# Altium PCB PCB2.PcbDoc
Units mm, origin at the board's own origin, x right, y up, seen from the top; angles counter-clockwise.
Board outline 50 x 20 mm, 2 copper layers (Top Layer, Bottom Layer); 47 components, 32 nets, 170 pads, 25 vias.
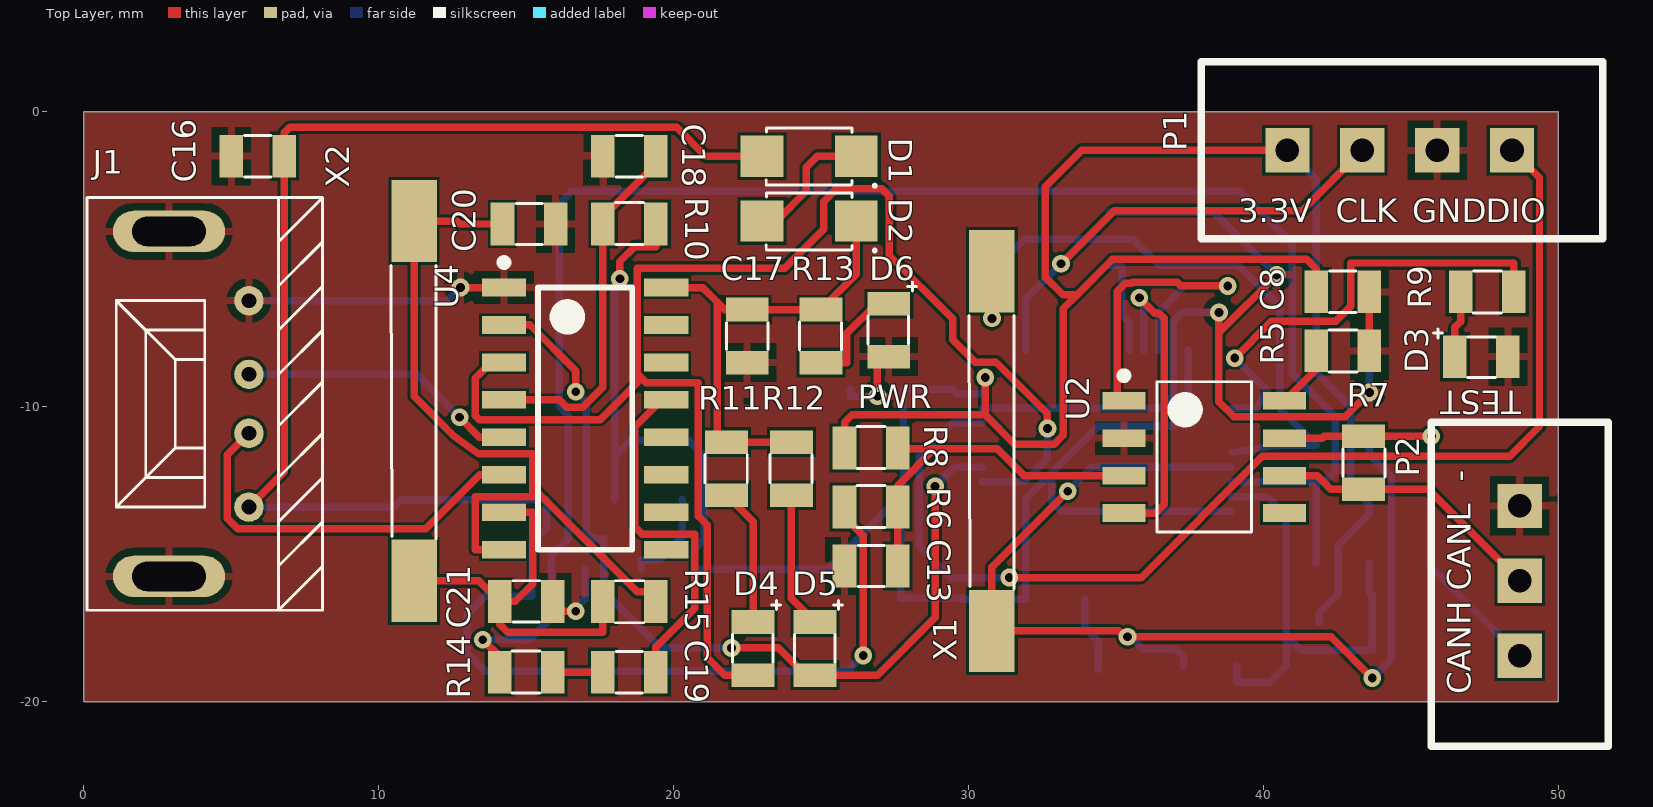
[diagram p0: Top Layer view]
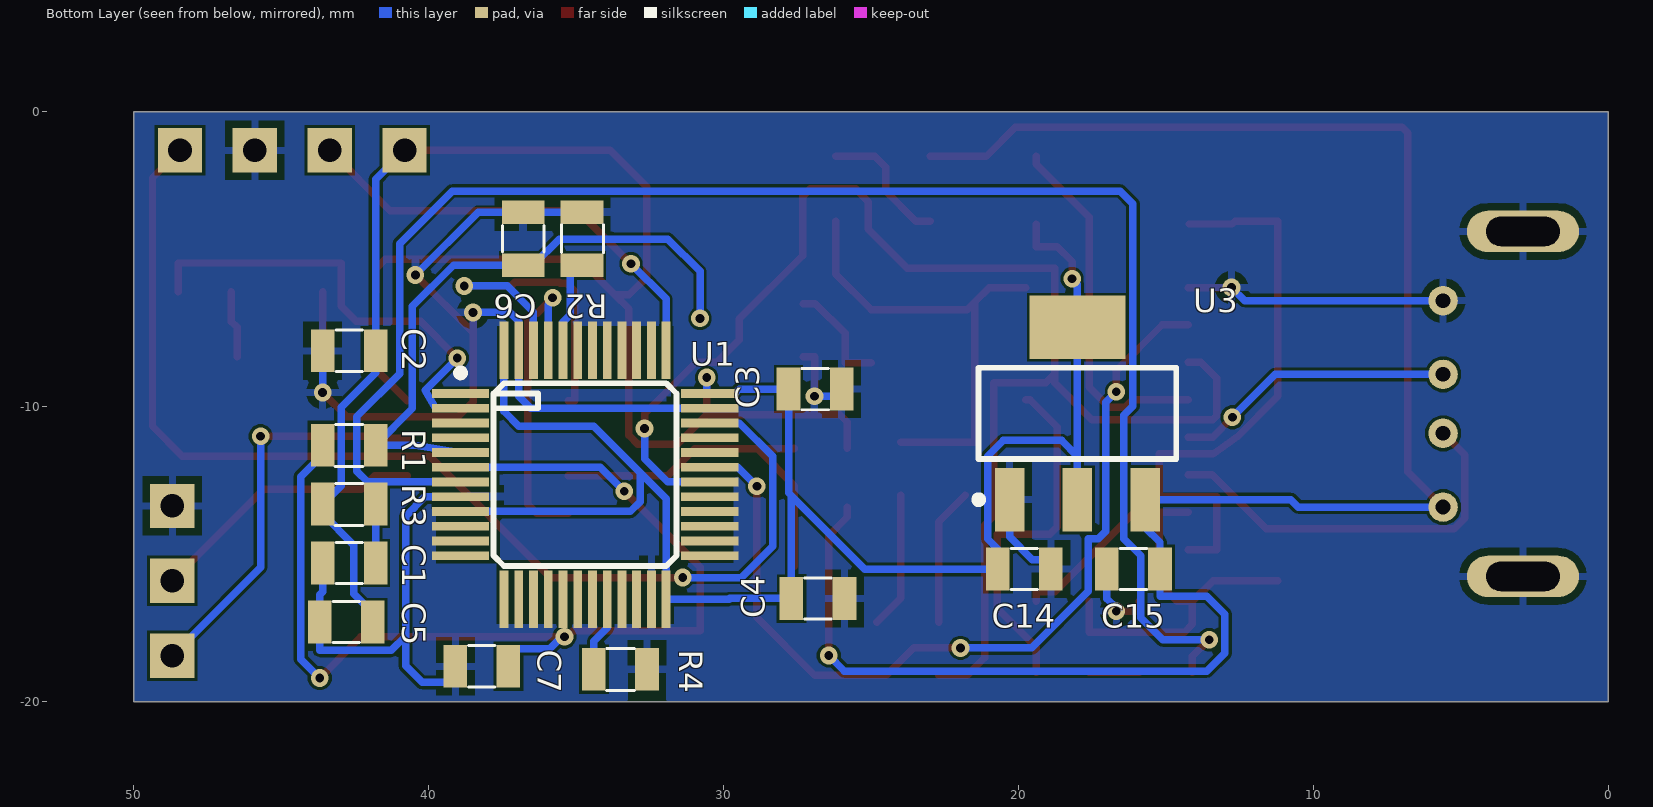
[diagram p1: Bottom Layer view, seen from below]

## Layer stack, top to bottom
Top Solder: solder mask 0.0102, Solder Resist, Dk 3.5
Top Layer: signal copper 0.0356
Dielectric 1: dielectric 0.32, FR-4, Dk 4.8
Bottom Layer: signal copper 0.0356
Bottom Solder: solder mask 0.0102, Solder Resist, Dk 3.5

## Board outline
0,-20 0,0 50,0 50,-20

## Design rules (kind name [scope] priority, off if disabled: settings)
Clearance [All] p1: gap=0.1 ignorepadtopadclearanceinfootprint=FALSE except(0: Arc-Hole Track-Hole SMDPad-Hole THPad-Hole Via-Hole Fill-Hole Poly-Hole Region-Hole Text-Hole; 0.16: Arc-Arc Arc-Track Track-Track)
HoleSize [All] p1: absolutevalues=TRUE maxlimit=10 minlimit=0.025 maxpercent=80.000 minpercent=20.000
HoleToHoleClearance [All] p1: gap=0 allowstackedmicrovias=TRUE
MinimumSolderMaskSliver [All] p1: minsoldermaskwidth=0
PolygonConnect [All] p1: connectstyle=Relief reliefconductorwidth=0.254 reliefentries=4 polygonreliefangle="90 Angle" airgapwidth=0.254
RoutingVias [All] p1: holewidth=0.3 width=0.6 viastyle="Through Hole" minholewidth=0.3 minwidth=0.6 maxholewidth=10 maxwidth=10
SilkToSilkClearance [All] p1: silktosilkclearance=0
SilkToSolderMaskClearance [IsPad] p1: minsilkscreentomaskgap=0 clearancetoexposedcopper=TRUE
SolderMaskExpansion [All] p1: expansion=0.102 istentingtop=FALSE
Width [All] p1: maxlimit=0.254 minlimit=0.254 preferedwidth=0.254
25 further rules are at their usual default settings.

## Components (designator, comment, footprint, x,y, rotation, side; value= is the part's Value field where it differs from the comment)
C1 "100nF" 0805_CAP 42.7,-15.3 r0 bottom
C2 "100nF" 0805_CAP 42.7,-8.1 r180 bottom
C3 "100nF" 0805_CAP 26.9,-9.4 r0 bottom
C4 "100nF" 0805_CAP 26.8,-16.5 r0 bottom
C5 "100nF" 0805_CAP 42.8,-17.3 r180 bottom
C6 "22pF" 0805_CAP 36.8,-4.3 r270 bottom
C7 "22pF" 0805_CAP 38.2,-18.8 r180 bottom
C8 "100nF" 0805_CAP 42.7,-6.1 r180 top
C13 "100nF" 0805_CAP 26.7,-15.4 r0 top
C14 "22uF" 0805_CAP 19.8,-15.5 r0 bottom
C15 "10uF" 0805_CAP 16.1,-15.5 r180 bottom
C16 "100nF" 0805_CAP 5.9,-1.5 r0 top
C17 "100nF" 0805_CAP 22.5,-7.6 r90 top
C18 "100nF" 0805_CAP 18.5,-1.5 r0 top
C19 "100nF" 0805_CAP 18.5,-19 r0 top
C20 "22pF" 0805_CAP 15.1,-3.8 r180 top
C21 "22pF" 0805_CAP 15,-16.6 r180 top
D1 "ES1006FL" ES1006FL 24.6,-1.5 r180 top
D2 "ES1006FL" ES1006FL 24.6,-3.7 r180 top
D3 "led_mavi" led 47.4,-8.3 r0 top
D4 "" led 22.7,-18.2 r270 top
D5 "" led 24.8,-18.2 r270 top
D6 "led_mavi" led 27.3,-7.4 r270 top
J1 "USB A" "USB A" 5.6,-8.9 r270 top
P1 "4'lu headers" "4'lu headers" 45.9,-1.3 r180 top
P2 "3'lu headers" "3'lu headers" 48.7,-13.44 r90 top
R1 "1M" res_0805 42.7,-11.3 r180 bottom
R2 "10K" res_0805 34.8,-4.3 r90 bottom
R3 "10K" res_0805 42.7,-13.3 r180 bottom
R4 "10K" res_0805 33.5,-18.9 r180 bottom
R5 "1K" res_0805 42.7,-8.1 r0 top
R6 "0" res_0805 26.7,-13.4 r180 top
R7 "120" res_0805 43.4,-11.9 r90 top
R8 "0" res_0805 26.7,-11.4 r180 top
R9 "10K" res_0805 47.6,-6.1 r0 top
R10 "0" res_0805 18.5,-3.8 r180 top
R11 "1K" res_0805 21.8,-12.1 r270 top
R12 "1K" res_0805 24,-12.1 r270 top
R13 "1K" res_0805 25,-7.6 r270 top
R14 "0" res_0805 15,-19 r180 top
R15 "1M" res_0805 18.5,-16.6 r0 top
U1 "stm32f103" STM32F103C6T8 34.7,-12.3 r180 bottom
U2 "MCP2551" SOIC-8 38,-11.7 r0 top
U3 "ams1117_3.3v" ams1117 18,-10.225 r90 bottom
U4 "ch340" "CH340 SOIC16" 17,-10.4 r0 top
X1 "8Mhz_kristal" 8mhz_kristal 30.8,-11.5 r90 top
X2 "8Mhz_kristal" 8mhz_kristal 11.2,-9.8 r90 top

## Footprints (in the part's own frame and the unit in brackets; to place one, negate y for a bottom-side part, rotate by r counter-clockwise, add the part's x,y. Pads: shape width x height; smd on the part's side, far side on the other; paste and mask are expansions set on the pad)
"3'lu headers" [mm] "2.54"
  rect 1.5x1.5 hole 0.8: 1(-5,0) 2(-2.46,0) 3(0.08,0)
  silkscreen extent -8.08,-3 2.92,3
"4'lu headers" [mm] "2.54"
  rect 1.5x1.5 hole 0.8: 1(-2.54,0) 2(0,0) 3(2.54,0) 4(5.08,0)
  silkscreen extent -5.62,-3 8,3
8mhz_kristal [mm] "kristal hc-49s smd"
  rect 2.79x1.54 smd: 1(-6.1,0) 2(6.1,0)
  silkscreen extent -4.67,-0.75 4.6,0.78, body extent -7.55,-0.75 7.55,0.75, height 4.7
0805_CAP [mm] "0805"
  rect 0.8x1.45 smd: 1(-0.9,0) 2(0.9,0)
  silkscreen extent -0.45,-0.7 0.45,0.7, body extent -1.1,-0.72 1.1,0.73, height 0.9
ams1117 [mm] "3.3v"
  rect 2.15x1 smd: 1(-2.925,2.3) 2(-2.925,0) 3(-2.925,-2.3)
  rect 2.15x3.25 smd: 4(2.925,0)
  silkscreen extent -3.05,-3.35 1.55,3.48, body extent -1.85,-3.35 1.85,3.35, height 1.8
"CH340 SOIC16" [mm] "SOIC127P600-8N"
  rect 1.5x0.6 smd: 1(-2.75,4.445) 2(-2.75,3.175) 3(-2.75,1.905) 4(-2.75,0.635) 5(-2.75,-0.635) 6(-2.75,-1.905) 7(-2.75,-3.175) 8(-2.75,-4.445) 9(2.75,-4.445) 10(2.75,-3.175) 11(2.75,-1.905) 12(2.75,-0.635) 13(2.75,0.635) 14(2.75,1.905) 15(2.75,3.175) 16(2.75,4.445)
  silkscreen extent -2.87,-4.45 1.6,5.42, body extent -1.75,-4.45 1.75,4.45, height 1.5
ES1006FL [mm] "ES1006FL 1A 600V Diyot Fred Ultra Hızlı"
  rect 1.45x1.4 smd: 1(-1.6,0) 2(1.6,0)
  silkscreen extent -2.27,-0.95 1.46,1.05, body extent -1.45,-0.95 1.45,0.95, height 1.1
led [mm] "0805"
  rect 0.8x1.45 smd: 1(-0.9,0) 2(0.9,0)
  silkscreen extent -1.62,-0.7 0.47,0.93, body extent -0.98,-0.63 1.03,0.62, height 1.1
res_0805 [mm] "R?"
  rect 0.8x1.45 smd: 1(-0.9,0) 2(0.9,0)
  silkscreen extent -0.48,-0.72 0.47,0.7, body extent -1.1,-0.72 1.1,0.72, height 0.9
SOIC-8 [mm] "8 Pin entegre"
  rect 1.45x0.6 smd: 1(-2.725,1.905) 2(-2.725,0.635) 3(-2.725,-0.635) 4(-2.725,-1.905) 5(2.725,-1.905) 6(2.725,-0.635) 7(2.725,0.635) 8(2.725,1.905)
  silkscreen extent -2.85,-2.55 1.6,2.88, body extent -2,-2.55 2,2.55, height 1.7
STM32F103C6T8 [mm] "LQFP48 9mm-9mm"
  rect 1.95x0.3 smd: 1(-4.225,2.75) 2(-4.225,2.25) 3(-4.225,1.75) 4(-4.225,1.25) 5(-4.225,0.75) 6(-4.225,0.25) 7(-4.225,-0.25) 8(-4.225,-0.75) 9(-4.225,-1.25) 10(-4.225,-1.75) 11(-4.225,-2.25) 12(-4.225,-2.75) 25(4.225,-2.75) 26(4.225,-2.25) 27(4.225,-1.75) 28(4.225,-1.25) 29(4.225,-0.75) 30(4.225,-0.25) 31(4.225,0.25) 32(4.225,0.75) 33(4.225,1.25) 34(4.225,1.75) 35(4.225,2.25) 36(4.225,2.75)
  rect 0.3x1.95 smd: 13(-2.75,-4.225) 14(-2.25,-4.225) 15(-1.75,-4.225) 16(-1.25,-4.225) 17(-0.75,-4.225) 18(-0.25,-4.225) 19(0.25,-4.225) 20(0.75,-4.225) 21(1.25,-4.225) 22(1.75,-4.225) 23(2.25,-4.225) 24(2.75,-4.225) 37(2.75,4.225) 38(2.25,4.225) 39(1.75,4.225) 40(1.25,4.225) 41(0.75,4.225) 42(0.25,4.225) 43(-0.25,4.225) 44(-0.75,4.225) 45(-1.25,4.225) 46(-1.75,4.225) 47(-2.25,4.225) 48(-2.75,4.225)
  rect 5x5 on Bottom Overlay: 49(-0.025,0.275)
  silkscreen extent -4.35,-3.1 3.1,3.57, body extent -3.07,-3.42 3.43,3.08, height 1.6
"USB A" [mm]
  round 1 hole 0.5: 1(4.5,0) 2(2,0) 3(0,0) 4(-2.5,0)
  oval 1.4x3.8 hole 1 slot 2.5 at 90 deg unplated: 4(-4.85,-2.71) 4(6.85,-2.71)
  silkscreen extent -6,-5.5 8,2.5

## Part data
C1 C2 C3 C4 C5 C6 C7 C8 C13 C14 C15 C16 C17 C18 C19 C20 C21: library part 0805_CAP, "0805 CAPACITOR"
D1 D2: "ES1006FL 1A 600V Diyot Fred Ultra Hızlı"
D3 D6: "0805 mavi led"
D4 D5: library part led_mavi, "0805 mavi led"
R1 R2 R3 R4 R5 R6 R7 R8 R9 R10 R11 R12 R13 R14 R15: library part 0805_RES, "0805"
U1: "STM MCU"
U2: "SOIC-8"
X1 X2: "2 pin kristal"

## Via types
v1: diameter 0.6, hole 0.3, Top Layer to Bottom Layer, 25 vias

## Nets (pads, with @x,y where several pads share a name; then routed paths per layer and width w, separated by ;. In a path a pad name is that pad's centre, name@x,y a point inside that pad or via, vN(x,y) a via of type N, cw(c..) or ccw(c..) an arc to the next point about the centre after c; other vN are vias at no path point)
+3.3: C2.2 C3.2 C4.2 C5.2 C8.2 C14.2 P1.4 R3.1 R8.2 R10.1 U1.9 U1.24 U1.36 U1.48 U3.2 U3.4 | length 115.7
  Top Layer w0.254: v1(18.18,-5.656) 18.18,-5.072 18.688,-4.564 19.4,-4.564 R10.1 ; R8.2 25.8,-10.527 26.054,-10.273 30.575,-10.273 ; v1(30.575,-9.009) 30.575,-10.273 ; P1.4 33.839,-1.3 32.607,-2.532 32.607,-5.599 33.21,-6.202 33.687,-6.202 ; C8.2 41.8,-5.326 41.475,-5.001 34.888,-5.001 33.687,-6.202 ; 30.575,-10.273 31.566,-11.263 32.912,-11.263 33.21,-10.965 33.21,-6.679 33.687,-6.202
  Bottom Layer w0.254: U3.2 18,-11.676 ; v1(18.18,-5.656) 18,-5.836 U3.4 18,-11.676 ; v1(30.575,-9.009) 30.575,-9.55 U1.36 29.629,-9.55 29.479,-9.4 C3.2 27.8,-12.922 27.7,-13.022 ; U1.48 37.45,-10.152 36.942,-10.66 34.411,-10.66 32.836,-12.235 ; U1.9 33.166,-13.55 32.836,-13.22 32.836,-12.235 ; P1.4 41.8,-2.28 C2.2 41.8,-8.852 42.97,-10.022 42.97,-12.67 R3.1 43.6,-13.632 42.539,-14.693 42.539,-16.346 41.9,-16.985 C5.2 ; 18,-11.676 18.533,-11.143 20.517,-11.143 21.05,-11.676 21.05,-14.475 20.7,-14.826 C14.2 20.7,-15.511 25.211,-15.511 27.7,-13.022 ; 27.7,-13.022 C4.2 29.788,-16.5 29.813,-16.525 U1.24 31.95,-13.121 32.836,-12.235
+5: C15.2 C16.2 D1.2 J1.1 R6.2 U3.3 | length 66.5
  Top Layer w0.254: J1.1 6.8,-12.2 C16.2 6.8,-0.703 6.978,-0.525 20.11,-0.525 21.085,-1.5 D1.2 ; R6.2 25.8,-13.733 26.435,-14.368 v1(26.435,-18.432)
  Bottom Layer w0.254: J1.1 10.509,-13.4 10.759,-13.15 U3.3 15.7,-14.097 15.2,-14.597 C15.2 15.2,-16.426 13.608,-16.426 12.998,-17.035 12.998,-18.356 13.608,-18.966 25.902,-18.966 v1(26.435,-18.432)
BOOT0: R2.1 U1.44 | length 3.4
  Bottom Layer w0.254: R2.1 35.198,-5.2 35.198,-6.875 35.45,-7.127 U1.44
BOOT1: R4.1 U1.20 | length 2.6
  Bottom Layer w0.254: U1.20 33.95,-17.5 34.4,-17.95 R4.1
CANH: P2.1 R7.2 U2.7 | length 13.7
  Top Layer w0.254: U2.7 42.005,-11.065 42.07,-11 R7.2 v1(45.704,-11)
  Bottom Layer w0.254: v1(45.704,-11) 45.704,-15.444 P2.1
CANL: P2.2 R7.1 U2.6 | length 9.5
  Top Layer w0.254: U2.6 41.827,-12.335 42.292,-12.8 R7.1 45.6,-12.8 P2.2
CANRX: U1.45 U2.4 | length 10.8
  Top Layer w0.254: U2.4 36.34,-13.605 36.641,-13.304 36.641,-7.002 36.461,-6.822 36.322,-6.822 v1(35.8,-6.3)
  Bottom Layer w0.254: v1(35.8,-6.3) 35.8,-6.394 35.95,-6.544 U1.45
CANTX: U1.46 U2.1 | length 11.9
  Top Layer w0.254: U2.1 35.046,-9.795 35.046,-6.088 35.319,-5.815 35.54,-5.815 35.582,-5.773 37.081,-5.773 37.208,-5.9 v1(38.8,-5.9)
  Bottom Layer w0.254: U1.46 36.45,-6.795 37.345,-5.9 v1(38.8,-5.9)
D+: J1.3 U4.5 | length 9.5
  Top Layer w0.254: v1(12.744,-10.355) 12.744,-10.363 13.417,-11.035 U4.5
  Bottom Layer w0.254: J1.3 11.289,-8.9 v1(12.744,-10.355)
D-: J1.2 U4.6 | length 13.5
  Top Layer w0.254: J1.2 4.87,-11.63 4.87,-13.784 5.226,-14.14 11.595,-14.14 13.43,-12.305 U4.6
GND: C1.2 C2.1 C3.1 C4.1 C5.1 C6.1 C7.1 C8.1 C13.1 C14.1 C15.1 C16.1 C17.1 C18.1 C20.1 C21.1 D3.2 D6.2 J1.4 P1.2 P2.3 R2.2 R4.2 R5.2 U1.8 U1.23 U1.35 U1.47 U2.2 U3.1 U4.1 | length 65.7
  Top Layer w0.254: v1(12.776,-5.955) U4.1 ; C21.1 15.9,-16.934 v1(16.681,-16.934) ; v1(26.918,-9.644) 26.918,-8.3 D6.2 ; v1(38.5,-6.799) 38.5,-7.485 ; v1(40.456,-5.529) 38.5,-7.485 ; v1(43.6,-9.517) 42.787,-10.33 39.008,-10.33 38.5,-9.822 38.5,-7.485 ; R5.2 C8.1
  Bottom Layer w0.254: J1.4@5.6,-6.4 12.331,-6.4 v1(12.776,-5.955) ; v1(16.681,-16.934) 16.681,-16.821 17,-16.502 C15.1 ; C14.1 18.9,-15.181 19.526,-15.181 20.3,-14.407 U3.1 ; C3.1 26,-9.644 v1(26.918,-9.644) ; U1.35 36.544,-10.05 36.95,-9.644 U1.47 36.95,-7.104 37.255,-6.799 v1(38.5,-6.799) ; R2.2 C6.1 38.327,-3.4 v1(40.456,-5.529) ; U1.8 40.13,-13.05 40.788,-13.708 40.788,-17.774 ; C7.1 39.1,-19.347 40.23,-19.347 40.788,-18.788 40.788,-17.774 ; C1.2 43.6,-16.275 43.7,-16.375 C5.1 43.7,-18.255 41.269,-18.255 40.788,-17.774 ; v1(43.6,-9.517) C2.1
LED: R9.2 U1.2 | length 15.7
  Top Layer w0.254: v1(39.033,-8.349) 40.278,-7.104 42.462,-7.104 42.97,-6.596 42.97,-5.123 48.5,-5.123 R9.2
  Bottom Layer w0.254: U1.2 39.77,-10.05 40.127,-9.442 v1(39.033,-8.349)
NetC13_2: C13.2 R6.1 R8.1 U2.3 | length 12.6
  Top Layer w0.254: C13.2 R6.1 27.6,-12.674 28.848,-11.426 ; R8.1 27.6,-11.426 28.848,-11.426 ; U2.3 31.891,-12.335 30.983,-11.426 28.848,-11.426
NetC17_2: C17.2 D2.1 R11.1 R12.1 R13.1 U4.16 | length 16.3
  Top Layer w0.254: U4.16 20.991,-5.955 21.482,-6.446 ; R12.1 R11.1 21.482,-11.2 21.482,-6.446 ; D2.1 26.2,-5.5 R13.1 C17.2 21.736,-6.7 21.482,-6.446
NetC18_2: C18.2 R10.2 U4.4 | length 12.3
  Top Layer w0.254: U4.4 16.123,-9.765 16.38,-10.022 16.917,-10.022 17.6,-9.339 R10.2 17.6,-3.573 19.4,-1.773 C18.2
NetC19_1: C19.1 R14.1 | length 1.7
  Top Layer w0.254: R14.1 C19.1
NetC19_2: C19.2 U4.13 | length 12.2
  Top Layer w0.254: C19.2 19.4,-18.153 20.727,-16.826 20.727,-14.318 18.942,-14.318 18.688,-14.064 18.688,-10.685 19.608,-9.765 U4.13
NetD1_1: D1.1 D2.2 | length 4.6
  Top Layer w0.254: D2.2 23.489,-3.7 24.508,-2.681 24.508,-1.874 24.882,-1.5 D1.1
NetD3_1: D3.1 R9.1 | length 2.3
  Top Layer w0.254: D3.1 46.5,-7.307 46.7,-7.107 R9.1
NetD4_1: D4.1 R11.2 | length 4.7
  Top Layer w0.254: R11.2 22.7,-13.9 D4.1
NetD5_1: D5.1 R12.2 | length 4.6
  Top Layer w0.254: R12.2 24,-16.5 D5.1
NetD6_1: D6.1 R13.2 | length 3.7
  Top Layer w0.254: R13.2 25.876,-8.5 25.876,-7.51 26.887,-6.5 D6.1
NetR5_1: R5.1 U2.8 | length 2.1
  Top Layer w0.254: U2.8 41.8,-8.72 R5.1
OSC_IN: C6.2 R1.2 U1.5 X1.2 | length 22.5
  Top Layer w0.254: v1(30.8,-7) X1.2@30.8,-5.4
  Bottom Layer w0.254: v1(30.8,-7) 30.8,-5.406 31.896,-4.31 35.578,-4.31 36.468,-5.2 C6.2 39.161,-5.2 40.557,-6.596 40.557,-10.057 R1.2 40.477,-11.3 U1.5
OSC_OUT: C7.2 R1.1 U1.6 X1.1 | length 36.2
  Top Layer w0.254: v1(33.369,-12.866) 30.8,-15.435 X1.1 35.106,-17.6 35.306,-17.8 42.3,-17.8 v1(43.7,-19.2)
  Bottom Layer w0.254: v1(33.369,-12.866) 34.185,-12.05 U1.6 ; v1(35.4,-17.8) 35.494,-17.8 35.896,-18.202 37.027,-18.202 37.3,-18.475 C7.2 ; R1.1 43.6,-11.625 44.342,-12.367 44.342,-18.558 v1(43.7,-19.2)
RST: C1.1 R3.2 R14.2 U1.7 | length 58.9
  Top Layer w0.254: v1(13.532,-17.899) 14.1,-18.467 R14.2
  Bottom Layer w0.254: v1(13.532,-17.899) 15.107,-17.899 15.854,-17.152 15.854,-15.043 16.427,-14.47 16.427,-10.279 16.123,-9.974 16.123,-3.116 16.554,-2.684 39.211,-2.684 40.989,-4.462 40.989,-8.882 42.437,-10.33 42.437,-12.184 42.071,-12.55 41.8,-12.55 ; U1.7 41.8,-12.55 ; C1.1 R3.2 41.8,-12.55
RX: D5.2 U1.31 U4.2 | length 30.7
  Top Layer w0.254: U4.2 15.132,-7.225 16.681,-8.774 v1(16.681,-9.492) ; v1(21.965,-18.178) 23.558,-18.178 24.479,-19.1 D5.2 26.918,-19.1 28.873,-17.144 v1(28.873,-12.692)
  Bottom Layer w0.254: v1(16.681,-9.492) 17.037,-9.847 17.037,-14.216 17.291,-14.47 17.627,-14.47 17.627,-16.254 19.552,-18.178 v1(21.965,-18.178) ; v1(28.873,-12.692) 29.515,-12.05 U1.31
SWCLK: P1.3 U1.37 | length 15.2
  Top Layer w0.254: v1(33.144,-5.148) 34.947,-3.345 41.315,-3.345 P1.3
  Bottom Layer w0.254: U1.37 31.95,-6.342 v1(33.144,-5.148)
SWDIO: P1.1 U1.34 | length 39
  Top Layer w0.254: v1(31.388,-15.791) 35.857,-15.791 39.972,-11.676 48.355,-11.676 49.371,-10.66 49.371,-2.231 P1.1
  Bottom Layer w0.254: U1.34 29.466,-10.55 28.34,-11.676 28.34,-14.724 29.407,-15.791 v1(31.388,-15.791)
TX: D4.2 U1.30 U4.3 | length 50.3
  Top Layer w0.254: U4.3 13.811,-8.495 13.273,-9.033 13.273,-10.304 13.405,-10.436 17.518,-10.436 18.764,-9.19 18.764,-8.882 ; D4.2 21.736,-19.1 21.152,-18.516 21.152,-14.013 20.847,-13.708 20.847,-9.19 19.072,-9.19 18.764,-8.882 ; v1(32.683,-10.736) 32.683,-10.228 30.937,-8.482 30.237,-8.482 29.473,-7.718 29.473,-7.018 27.324,-4.869 27.324,-2.862 27.07,-2.608 25.521,-2.608 25.089,-3.04 25.089,-3.98 23.768,-5.301 18.764,-5.301 18.764,-8.882
  Bottom Layer w0.254: U1.30 31.896,-12.55 32.683,-11.763 v1(32.683,-10.736)
XI: C21.2 R15.1 U4.7 X2.1 | length 13.4
  Top Layer w0.254: X2.1 13.4,-15.9 C21.2 C21.2@14.1,-16.604 ; U4.7 15.234,-13.575 15.234,-15.994 14.624,-16.604 C21.2@14.1,-16.604 ; R15.1 17.6,-17.64 14.37,-17.64 14.1,-17.37 C21.2@14.1,-16.604
XO: C20.2 R15.2 U4.8 X2.2 | length 25.9
  Top Layer w0.254: C20.2 12.743,-3.8 12.643,-3.7 X2.2 11.2,-9.649 12.541,-10.99 13.396,-11.6 15.234,-11.6 15.234,-12.743 ; U4.8 13.273,-14.845 13.273,-13.048 15.234,-13.048 15.234,-12.743 ; R15.2 19.4,-16.273 18.764,-16.273 15.234,-12.743
pads on no net: U1.1 U1.3 U1.4 U1.10 U1.11 U1.12 U1.13 U1.14 U1.15 U1.16 U1.17 U1.18 U1.19 U1.21 U1.22 U1.25 U1.26 U1.27 U1.28 U1.29 U1.32 U1.33 U1.38 U1.39 U1.40 U1.41 U1.42 U1.43 U1.49 U2.5 U4.9 U4.10 U4.11 U4.12 U4.14 U4.15

## Polygon pours and split planes (outlines as drawn)
GND on Bottom Layer "NONET_L02_P-001" (solid, pour order 1): 0,0 50,0 50,-20 0,-20
GND on Top Layer "NONET_L02_P-001" (solid, pour order 0): 0,0 50,0 50,-20 0,-20

## Silkscreen, mask and mechanical layers (free items; w line width, h text height)
Top Overlay:
  text "3.3V" at 39.154,-3.746 h0.8
  text "CLK" at 42.454,-3.746 h0.8
  text "GND" at 45.054,-3.746 h0.8
  text "DIO" at 47.554,-3.746 h0.8
  text "TEST" at 48.746,-9.454 h0.8 r180
  text "PWR" at 26.254,-10.046 h0.8
  text "-" at 47.046,-12.546 h0.8 r90
  text "CANL" at 47.046,-16.246 h0.8 r90
  text "CANH" at 47.046,-19.746 h0.8 r90
Mechanical 1:
  the board outline again, w0.1